# Altium PCB TLV320AIC23B.PcbDoc
Units mil, origin at the board's own origin, x right, y up, seen from the top; angles counter-clockwise.
Board outline 1965 x 1829.38 mil, 2 copper layers (Top Layer, Bottom Layer), stack 62.8 mil thick; 63 components, 45 nets, 198 pads, 103 vias.
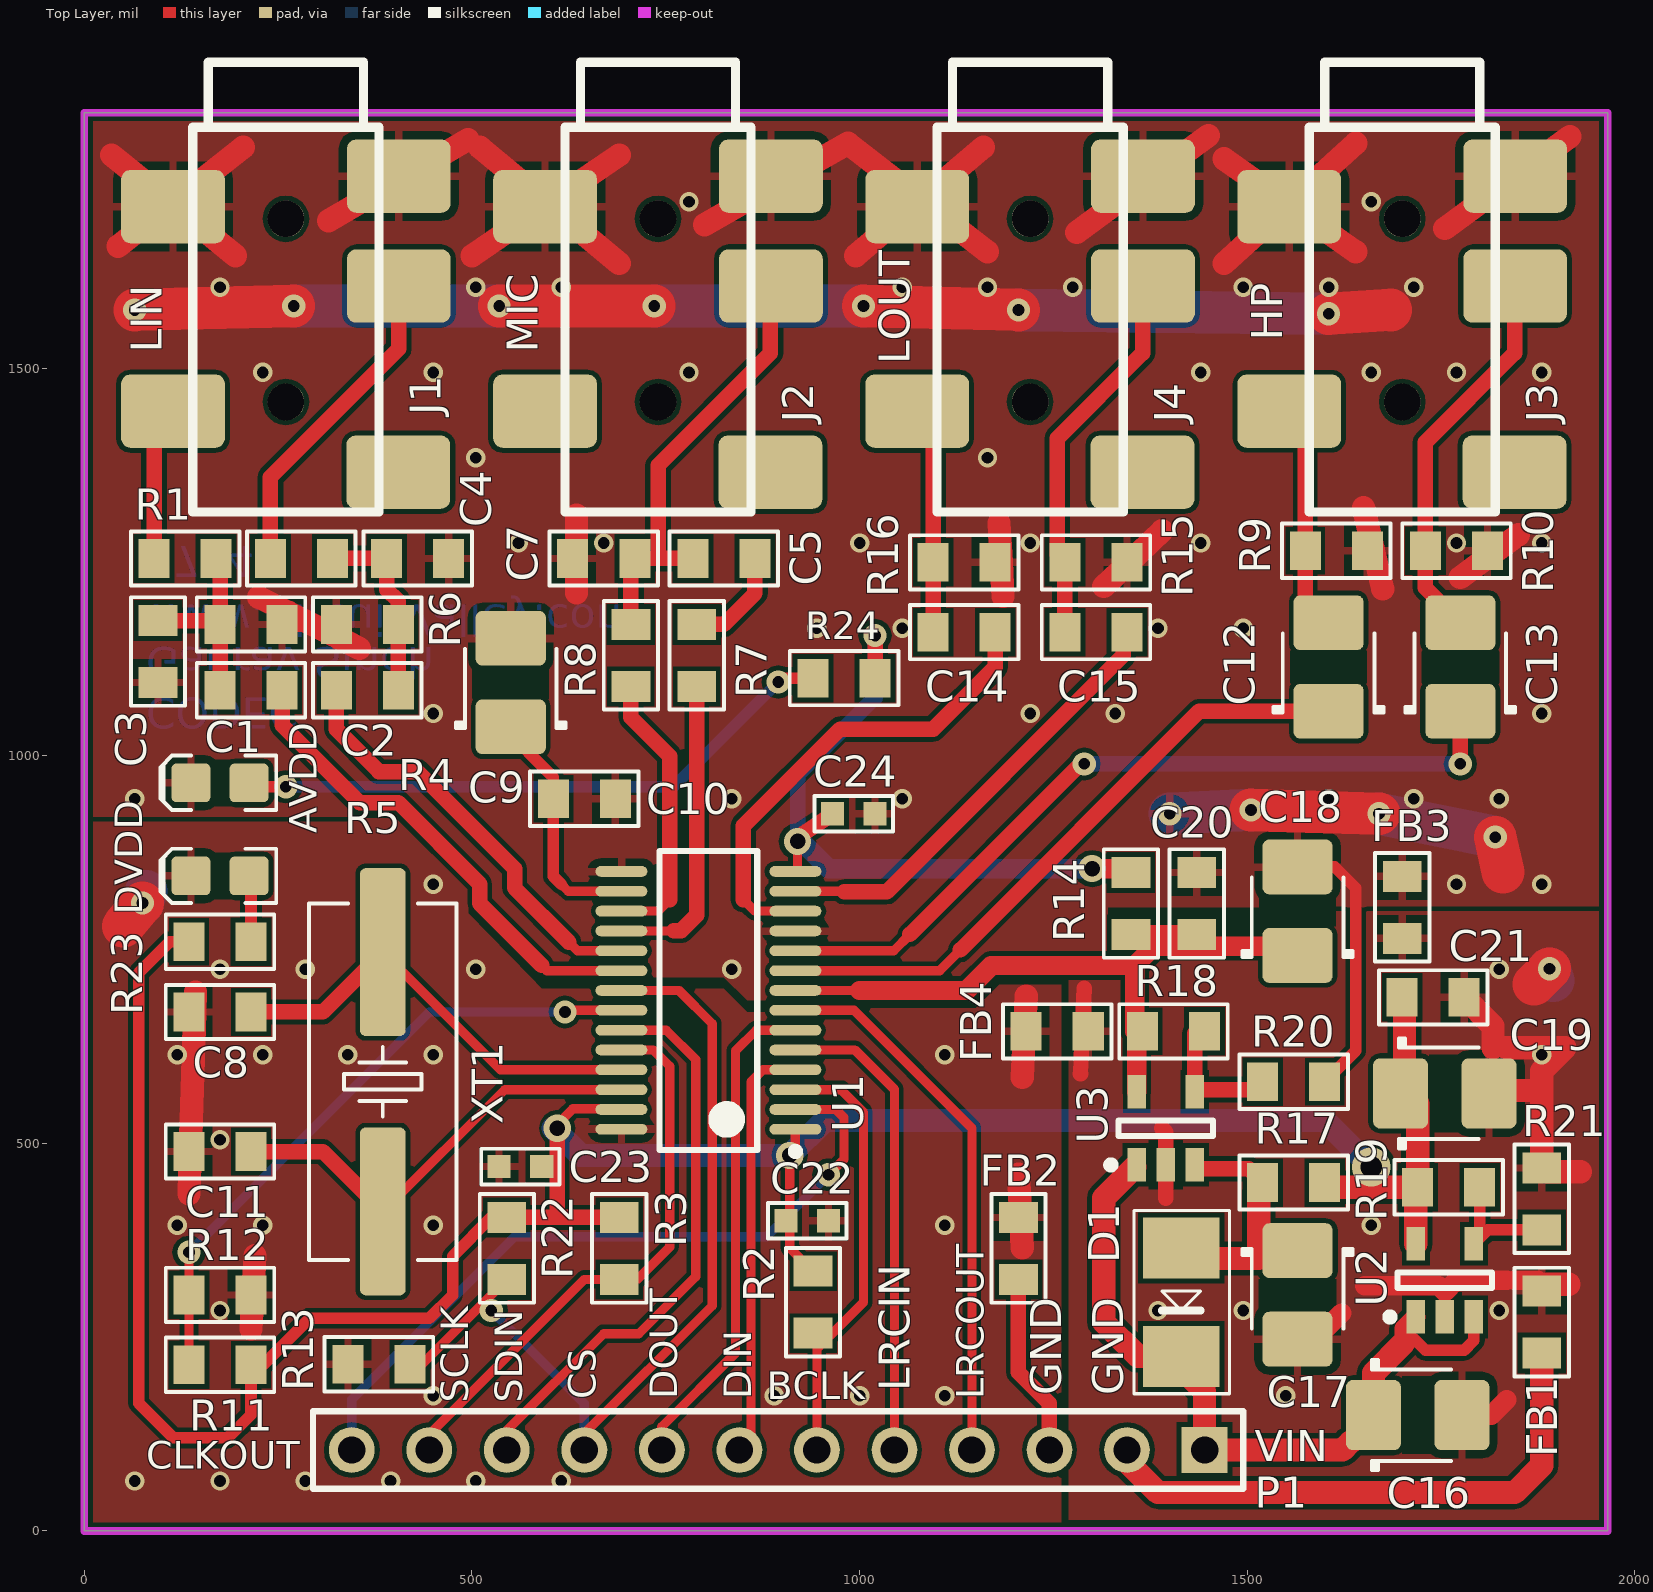
[diagram p0: Top Layer view]
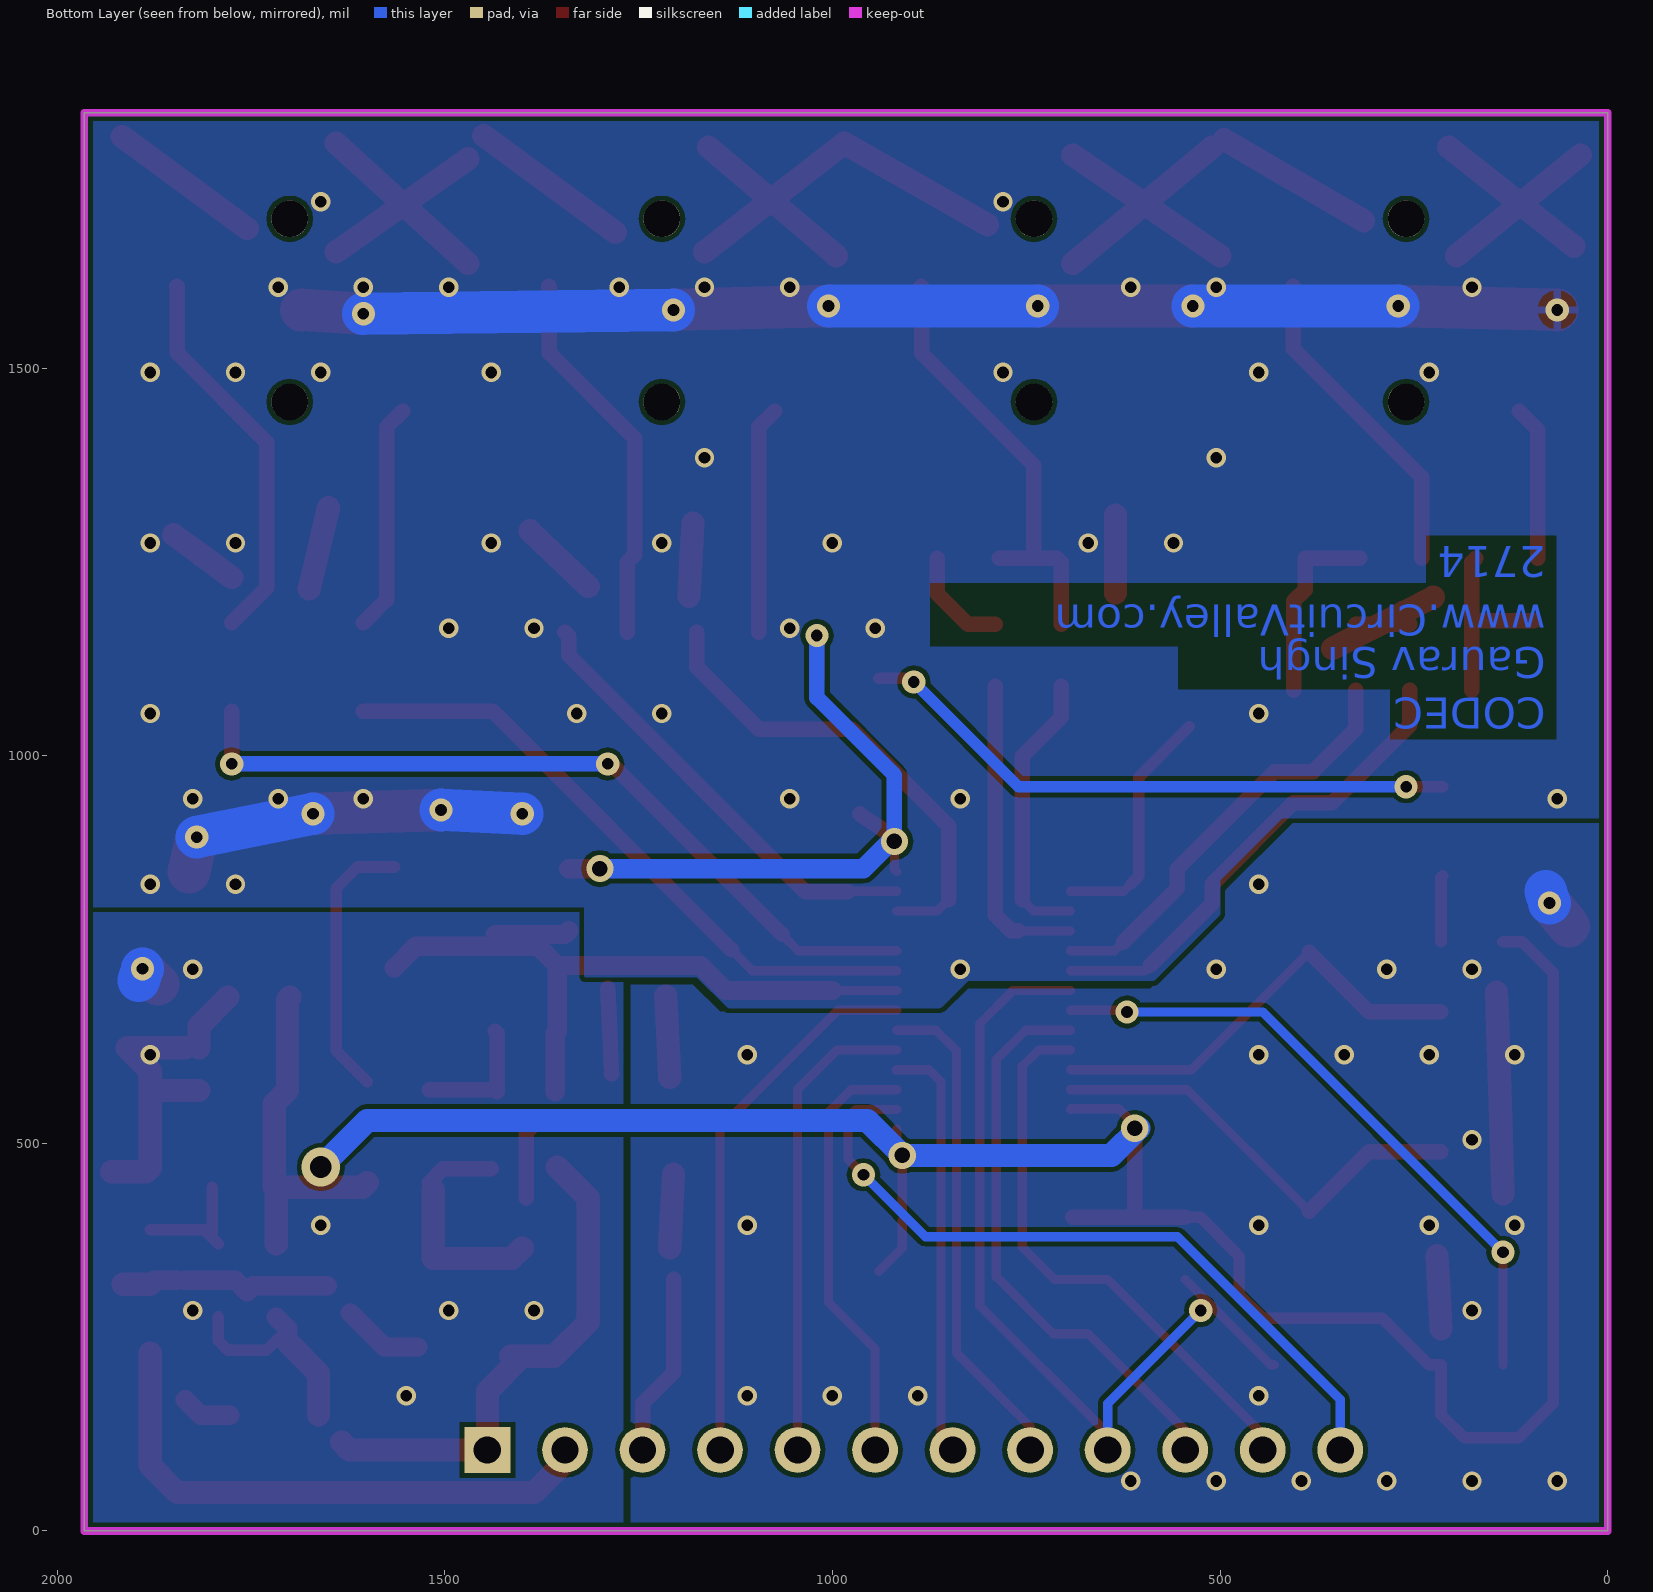
[diagram p1: Bottom Layer view, seen from below]

## Layer stack, top to bottom
Top Layer: signal copper 1.4
Dielectric: core 60, FR-4, Dk 4.8
Bottom Layer: signal copper 1.4

## Board outline
0,0 1965,0 1965,1829.38 0,1829.38 0,0

## Design rules (kind name [scope] priority, off if disabled: settings)
Clearance [All] p1: gap=6
PolygonConnect [All] p1: connectstyle=Relief reliefconductorwidth=10 reliefentries=4 polygonreliefangle="90 Angle" airgapwidth=10
RoutingVias [All] p1: holewidth=15 width=30 viastyle="Through Hole" minholewidth=12 minwidth=30 maxholewidth=250 maxwidth=250
SolderMaskExpansion [All] p1: expansion=4
Width [All] p1: maxlimit=250 minlimit=6 preferedwidth=20
28 further rules are at their usual default settings.

## Components (designator, comment, footprint, x,y, rotation, side; value= is the part's Value field where it differs from the comment)
AVDD "Green" LED-0805-K 175,965 r180 top (schematic designator LED2)
C1 "C0805-GENERIC" 0805C-GENERIC 245,1084.38 r180 top
C2 "C0805-GENERIC" 0805C-GENERIC 335,1084.38 r0 top
C3 "C0805-GENERIC" 0805C-GENERIC 95,1104.38 r90 top
C4 "C0805-GENERIC" 0805C-GENERIC 460,1254.38 r180 top
C5 "C0805-GENERIC" 0805C-GENERIC 795,1254.38 r0 top
C7 "C0805-GENERIC" 0805C-GENERIC 640,1254.38 r0 top
C8 "C0805-GENERIC" 0805C-GENERIC 145,669.38 r0 top
C9 "47µ" CAPMP3528X210N 550,1094.38 r90 top
C10 "C0805-GENERIC" 0805C-GENERIC 615,944.38 r0 top
C11 "C0805-GENERIC" 0805C-GENERIC 205,489.38 r180 top
C12 "47µ" CAPMP3528X210N 1605,1114.38 r90 top
C13 "47µ" CAPMP3528X210N 1775,1114.38 r90 top
C14 "C0805-GENERIC" 0805C-GENERIC 1105,1159.38 r0 top
C15 "C0805-GENERIC" 0805C-GENERIC 1275,1159.38 r0 top
C16 "47µ" CAPMP3528X210N 1720,149.38 r0 top
C17 "47µ" CAPMP3528X210N 1565,304.38 r270 top
C18 "47µ" CAPMP3528X210N 1565,799.38 r90 top
C19 "47µ" CAPMP3528X210N 1755,564.38 r0 top
C20 "C0805-GENERIC" 0805C-GENERIC 1435,779.38 r90 top
C21 "C0805-GENERIC" 0805C-GENERIC 1710,688.24 r0 top
C22 "100nF" 0603C-GENERIC 905,400 r0 top
C23 "100nF" 0603C-GENERIC 590,470 r180 top
C24 "100nF" 0603C-GENERIC 965,925 r0 top
D1 "MBRS140" DIODE-SMA 1415,399.38 r90 top
DVDD "Green" LED-0805-K 175,845 r180 top (schematic designator LED1)
FB1 "0805FB-GENERIC" 0805FB-GENERIC 1880,239.38 r90 top
FB2 "0805FB-GENERIC" 0805FB-GENERIC 1205,334.38 r90 top
FB3 "0805FB-GENERIC" 0805FB-GENERIC 1700,774.38 r90 top
FB4 "0805FB-GENERIC" 0805FB-GENERIC 1285,644.38 r180 top
J1 "Audio SMD 3.5mm" SMDAudio3.5mm 260,1574.38 r270 top
J2 "Audio SMD 3.5mm" SMDAudio3.5mm 740,1574.38 r270 top
J3 "Audio SMD 3.5mm" SMDAudio3.5mm 1700,1574.38 r270 top
J4 "Audio SMD 3.5mm" SMDAudio3.5mm 1220,1574.38 r270 top
P1 "Header 12" HDR1X12 1445,104.38 r180 top
R1 "R0805" 0805R-GENERIC 160,1254.38 r180 top
R2 "R0805" 0805R-GENERIC 940,265 r90 top
R3 "R0805" 0805R-GENERIC 690,334.38 r90 top
R4 "R0805" 0805R-GENERIC 310,1254.38 r180 top
R5 "R0805" 0805R-GENERIC 245,1169.38 r180 top
R6 "R0805" 0805R-GENERIC 335,1169.38 r0 top
R7 "R0805" 0805R-GENERIC 790,1099.38 r90 top
R8 "R0805" 0805R-GENERIC 705,1099.38 r90 top
R9 "R0805" 0805R-GENERIC 1645,1264.38 r180 top
R10 "R0805" 0805R-GENERIC 1800,1264.38 r180 top
R11 "R0805" 0805R-GENERIC 145,214.38 r0 top
R12 "R0805" 0805R-GENERIC 205,304.38 r180 top
R13 "R0805" 0805R-GENERIC 350,215 r0 top
R14 "R0805" 0805R-GENERIC 1350,779.38 r90 top
R15 "R0805" 0805R-GENERIC 1335,1249.38 r180 top
R16 "R0805" 0805R-GENERIC 1165,1249.38 r180 top
R17 "R0805" 0805R-GENERIC 1590,449.38 r180 top
R18 "R0805" 0805R-GENERIC 1375,644.38 r0 top
R19 "R0805" 0805R-GENERIC 1730,443.24 r0 top
R20 "R0805" 0805R-GENERIC 1590,579.38 r180 top
R21 "R0805" 0805R-GENERIC 1880,458.24 r270 top
R22 "R0805" 0805R-GENERIC 545,334.38 r90 top
R23 "R0805" 0805R-GENERIC 205,760 r180 top
R24 "R0805" 0805R-GENERIC 950,1100 r0 top
U1 "TLV320AIC23BPWG4" PW28_N 805,684.38 r180 top
U2 "TPS76301DBVR" TI-DBV5_N 1755,323.24 r90 top
U3 "TPS76301DBVR" TI-DBV5_N 1395,519.38 r90 top
XT1 "6.00MHz" CRYSTAL_HC49-US-SM 385,579.38 r90 top

## Footprints (in the part's own frame and the unit in brackets; to place one, negate y for a bottom-side part, rotate by r counter-clockwise, add the part's x,y. Pads: shape width x height; smd on the part's side, far side on the other; paste and mask are expansions set on the pad)
0603C-GENERIC [mil] "CAPACITOR 0603"
  rect 30x30 smd: 1(0,0) 2(55,0)
  silkscreen extent -23,-23 78,23, body extent -4,-15 59,15, height 19
0805C-GENERIC [mil] "CAPACITOR 0805"
  rect 40x50 smd: 1(-10,0) 2(70,0)
  silkscreen extent -40,-35 100,35, body extent -11,-25 70,25, height 26
0805FB-GENERIC [mil] "FERRITE BEAD 0805"
  rect 40x50 smd: 1(-10,0) 2(70,0)
  silkscreen extent -40,-35 100,35, body extent -11,-25 70,25, height 26
0805R-GENERIC [mil] "RESISTOR 0805"
  rect 40x50 smd: 1(-10,0) 2(70,0)
  silkscreen extent -40,-35 100,35, body extent -11,-25 70,25, height 27
CAPMP3528X210N [mm] "Molded body capacitor, Body 3.5x2.8mm, 1210, IPC Nominal settings"
  round 0.254 on Mech14: 0(0,0)
  rrect25% 1.8x2.3 smd: 1(-1.45,0) 2(1.45,0)
  Top Layer pour cut-out: -0.508,1.27 0.508,1.27 0.508,-1.27 -0.508,-1.27
  silkscreen extent -1.5,-1.8 1.1,1.8, body extent -1.75,-1.4 1.75,1.4, height 2.1
CRYSTAL_HC49-US-SM [mm] "SMD Crystal HC49/US-SM package"
  round 0.508 on Mech14: 0(0,0)
  rrect25% 5.5x1.5 smd: 1(-4.25,0) 2(4.25,0)
  silkscreen extent -5.84,-2.41 5.84,2.41, body extent -6.4,-2.41 6.4,2.42, height 4.29
DIODE-SMA [mm]
  rect 2x2.5 smd: A(-0.875,0) K(-4.425,0)
  silkscreen extent -5.65,-1.58 0.35,1.55, body extent -5.2,-1.3 0,1.3, height 2.4
HDR1X12 [mm] "Connector; Header; 12 Position"
  rect 1.5x1.5 hole 0.9: 1(0,0)
  round 1.5 hole 0.9: 2(2.54,0) 3(5.08,0) 4(7.62,0) 5(10.16,0) 6(12.7,0) 7(15.24,0) 8(17.78,0) 9(20.32,0) 10(22.86,0) 11(25.4,0) 12(27.94,0)
  silkscreen extent -1.27,-1.27 29.21,1.27
LED-0805-K [mil]
  round 20 on Mech14: 0(0,0)
  rrect25% 50x50 smd: A(-37.5,0) K(37.5,0)
  Top Layer pour cut-out: -15,30 15,30 15,-30 -15,-30
  silkscreen extent -72,-35 77,35, body extent -39,-25 39,25, height 31
PW28_N [mm] "TSOP, 28-Leads, Body 9.7x4.4mm, Pitch 0.65mm, IPC Medium Density"
  oval 1.7x0.35 smd: 1(-2.85,4.225) 2(-2.85,3.575) 3(-2.85,2.925) 4(-2.85,2.275) 5(-2.85,1.625) 6(-2.85,0.975) 7(-2.85,0.325) 8(-2.85,-0.325) 9(-2.85,-0.975) 10(-2.85,-1.625) 11(-2.85,-2.275) 12(-2.85,-2.925) 13(-2.85,-3.575) 14(-2.85,-4.225) 15(2.85,-4.225) 16(2.85,-3.575) 17(2.85,-2.925) 18(2.85,-2.275) 19(2.85,-1.625) 20(2.85,-0.975) 21(2.85,-0.325) 22(2.85,0.325) 23(2.85,0.975) 24(2.85,1.625) 25(2.85,2.275) 26(2.85,2.925) 27(2.85,3.575) 28(2.85,4.225)
  silkscreen extent -2.98,-4.9 1.6,5.07, body extent -2.25,-4.9 2.25,4.9, height 1.2
SMDAudio3.5mm [mm]
  rrect25% 2.4x3.4 smd: 1(-3.4,-3.7) 2(3.3,-3.7) 3(-0.8,3.7) 4(5.3,3.683) 5(-4.4,3.7)
  round 1.2 hole 1.2 unplated: 6(-3,0) 7(3,0)
  silkscreen extent -8.13,-3.05 6.6,3.05, body extent -7.97,-3.05 6.6,3.05, height 5
TI-DBV5_N [mm] "SOT23, 5-Leads, Body 2.9x1.6mm, Pitch 0.95mm, IPC Medium Density"
  rect 1.1x0.6 smd: 1(-1.2,0.95) 2(-1.2,0) 3(-1.2,-0.95) 4(1.2,-0.95) 5(1.2,0.95)
  silkscreen extent -1.32,-1.55 0.25,1.92, body extent -0.87,-1.52 0.87,1.53, height 1.45

## Part data
AVDD DVDD: library part LED_SMD_Green_0805, "LED, 0805 SMD, Green"
C1 C2 C3 C4 C5 C7 C8 C10 C11 C14 C15 C20 C21: "GENERIC CAPACITOR NON POLARISED0603"
C9 C12 C13 C16 C17 C18 C19: library part CAPT_47u_1210_6V3, "Capacitor SMD Tantalum 47uF 20% 6.3V 1210"
C22 C23 C24: library part 0603C-100NF-25V-X7R-TDK, "CAPACITOR 0603 CERAMIC"
D1: "DIODE"
FB1 FB2 FB3 FB4: "FERRITE BEAD SMD"
P1: "Header, 12-Pin"
R1 R2 R3 R4 R5 R6 R7 R8 R9 R10 R11 R12 R13 R14 R15 R16 R17 R18 R19 R20 R21 R22 R23 R24: library part R0805-GENERIC, "GENERIC RESISTOR 0805"
U1: "Low-Power Stereo CODEC with HP Amplifier, 1 ADC and 1 DAC, 100 dB DAC SNR, 0 to 70 degC, 28-pin TSSOP (PW), Green (RoHS & no Sb/Br)"
U2 U3: "Single Output LDO, 150 mA, Adjustable 1.5 to 6.5 V Output, 2.7 to 10 V Input, with Low IQ, 5-pin SOT-23 (DBV), -40 to 125 degC, Green (RoHS & no Sb/Br)"
XT1: library part Crystal_6MHz_HC49/US, "Resonator Ceramic 6.00 MHz 30ppm"

## Via types
v1: diameter 25, hole 15, Top Layer to Bottom Layer, tented both sides, 76 vias
v2: diameter 30, hole 15, Top Layer to Bottom Layer, tented both sides, 22 vias
v3: diameter 35, hole 20, Top Layer to Bottom Layer, tented both sides, 4 vias
v4: diameter 50, hole 28, Top Layer to Bottom Layer, tented both sides, 1 vias

## Nets (pads, with @x,y where several pads share a name; then routed paths per layer and width w, separated by ;. In a path a pad name is that pad's centre, name@x,y a point inside that pad or via, vN(x,y) a via of type N, cw(c..) or ccw(c..) an arc to the next point about the centre after c; other vN are vias at no path point)
AGND: AVDD.K C3.1 C4.1 C7.1 C9.2 C10.2 C18.2 C20.2 C24.2 FB3.2 J1.1 J1.5 J2.1 J2.5 J3.1 J3.5 J4.1 J4.5 R5.1 R6.1 R9.1 R10.1 R15.1 R16.1 R20.1 U1.11 U1.15 | length 5749.4
  Top Layer w15: C18.2 1612.91,856.46 1640,829.38 1640,619.38 R20.1
  Top Layer w20: R5.1 293.94,1169.38 R6.1
  Top Layer w30: 35,1775 J1.1@112.68,1711.88 ; 43.49,1657.08 111.92,1711.28 J1.1@112.68,1711.88 ; 195,1645 115.46,1709.62 J1.1@112.68,1711.88 ; 205,1785 J1.1@112.68,1711.88 ; 225,1204.38 262.98,1185.09 293.94,1169.38 318.63,1156.84 355,1138.38 ; 315,1690 398.32,1738.6 407.72,1744.09 495,1795 ; 500,1645 593.72,1709.12 J2.1@597.75,1711.88 ; 510,1785 597.52,1712.06 J2.1@597.75,1711.88 ; 635,1210 635,1310 ; 690,1635 J2.1@597.75,1711.88 ; 690,1775 J2.1@597.75,1711.88 ; 800,1685 891.67,1737.03 985,1790 J4.1@1079.38,1716.59 ; 995,1645 1072.32,1710.6 J4.1@1079.38,1716.59 ; 1160,1785 J4.1@1079.38,1716.59 ; 1165,1650 1080.29,1715.89 J4.1@1079.38,1716.59 ; 1180,1300 1182.65,1249.78 1185,1205.38 ; 1280,1675 1370.26,1741.36 1450,1800 ; 1315,1218.38 1346.17,1248.15 1390,1290 ; 1470,1635 1552.51,1710.23 J3.1@1553.45,1711.09 ; 1470,1770 J3.1@1553.45,1711.09 ; 1640,1650 1557.22,1708.43 1555.39,1709.73 J3.1@1553.45,1711.09 ; 1640,1790 J3.1@1553.45,1711.09 ; 1650,1320 1662.8,1266.23 1675,1215 ; 1755,1680 1846.11,1747 1916.51,1798.76 ; 1775,1230 1814.15,1258.71 1850,1285
  Top Layer w55: v2(65,1575) v2(270,1580) ; v2(535,1580) v2(735,1580) ; v2(1005,1580) v2(1205,1575) ; v2(1505,930) v2(1670,925) ; v2(1605,1570) 1685,1575 ; v2(1820,895) 1830,850
  Bottom Layer w55: v2(270,1580) v2(535,1580) ; v2(735,1580) v2(1005,1580) ; v2(1205,1575) v2(1605,1570) ; v2(1400,925) v2(1505,930) ; v2(1670,925) v2(1820,895)
  other v1: 835,724.38 1770,834.38 1880,834.38 65,944.38 835,944.38 1055,944.38 1605,944.38 1715,944.38 1825,944.38 450,1054.38 1220,1054.38 1330,1054.38 1880,1054.38 945,1164.38 1055,1164.38 1385,1164.38 1495,1164.38 560,1274.38 670,1274.38 1000,1274.38 1220,1274.38 1440,1274.38 1770,1274.38 1880,1274.38 505,1384.38 1165,1384.38 230,1494.38 450,1494.38 780,1494.38 1440,1494.38 1660,1494.38 1770,1494.38 1880,1494.38 175,1604.38 505,1604.38 615,1604.38 1055,1604.38 1165,1604.38 1275,1604.38 1495,1604.38 1605,1604.38 1715,1604.38 780,1714.38 1660,1714.38
AVDD: C24.1 R14.2 R24.2 U1.14 | length 894.3
  Top Layer w12: U1.14 920,853.51 v3(920,889.38) v3@920,894.38
  Top Layer w20: v3@920,894.38 C24.1 ; R24.2 v2(1020,1155)
  Top Layer w25: v3(1300,854.38) R14.2@1340,854.38
  Bottom Layer w20: v3(920,889.38) 920,975 1020,1075 v2(1020,1155)
  Bottom Layer w25: v3@922.5,891.88 960,854.38 v3(1300,854.38)
BCLK: P1.6 R2.1 U1.3 | length 560.5
  Top Layer w12: U1.3 975.97,569.22 1005,540.18 1005,295 945,235 P1.6
CLKOUT: P1.12 U1.2 | length 949.3
  Top Layer w12: U1.2 969.47,543.63 980,533.1 980,479.38 v2(960,459.38)
  Bottom Layer w12: P1.12 345,169.38 555,379.38 880,379.38 v2(960,459.38)
DGND: C8.1 C11.2 C22.2 C23.2 DVDD.K FB2.2 FB4.2 R12.1 R13.1 U1.28 | length 609.8
  Top Layer w30: 135,435 136.75,489.32 142.55,669.13 143.39,695.21 ; 215,260.38 217.32,304.25 220,355 ; 1205,460 1207.93,404.53 1210,365.38 ; 1210,585 1212.83,644.48 1215,690
  Top Layer w55: 50,780 v2(75,810)
  Bottom Layer w55: v2(75,810) 80,825
  other v1: 65,64.38 175,64.38 285,64.38 395,64.38 505,64.38 615,64.38 450,174.38 890,174.38 1000,174.38 1110,174.38 175,284.38 120,394.38 230,394.38 450,394.38 1110,394.38 175,504.38 120,614.38 230,614.38 340,614.38 450,614.38 1110,614.38 175,724.38 285,724.38 505,724.38 450,834.38
DIN: P1.7 U1.4 | length 545.4
  Top Layer w12: P1.7 860,119.38 860,579.38 875.43,594.81 U1.4 U1.4@917.64,594.38
DOUT: P1.8 U1.6 | length 642.6
  Top Layer w12: P1.8 745,134.38 840,229.38 840,619.38 866.61,645.99 U1.6
DVDD: C19.1 C21.1 C22.1 C23.1 R2.2 R3.2 R11.2 R17.1 R19.1 R22.2 R23.2 U1.1 U1.27 U2.5 | length 3454.1
  Top Layer w12: v3(610,519.38) 610,524.38 630,544.38 692.05,544.38 U1.27 ; C22.1@910,400 910,365 R2.2 ; C22.1@910,410 v3(910,484.38) 917.2,491.58 U1.1
  Top Layer w15: R23.2 110,760 70,720 70,164.47 114.47,120 185,120 215,150 R11.2 230.53,214.38 290.53,274.38 445,274.38 475,304.38 475,354.38 525,404.38 R22.2
  Top Layer w20: R22.2 605,404.38 ; v3(610,519.38) 610,409.38 605,404.38 ; R3.2 605,404.38
  Top Layer w30: R17.1 1606.14,443.24 1660,443.24 ; v4(1660,469.38) 1663.07,466.31 1663.07,443.24 R19.1 ; C21.1 1702.91,685.32 1702.91,568.24 1720,551.15 R19.1 ; U2.5 1717.6,440.84 R19.1
  Bottom Layer w30: v3(610,519.38) 605,519.38 640,484.38 v3(910,484.38) 955,529.38 1600,529.38 v4(1660,469.38)
GND: FB1.1 P1.2 | length 726.1
  Top Layer w30: P1.2 1345,89.38 1385,49.38 1845,49.38 1880,84.38 FB1.1
HEADPHONE_L: C12.1 U1.9 | length 826.4
  Top Layer w12: U1.9 1103.39,722.76 1130,749.38
  Top Layer w20: 1130,749.38 1437.91,1057.29 C12.1
HEADPHONE_R: C13.1 U1.10 | length 1025.5
  Top Layer w12: U1.10 1043.98,748.35 1065,769.38
  Top Layer w20: 1065,769.38 1285,989.38 v2(1290,989.38) ; v2(1775,989.38) C13.1
  Bottom Layer w20: v2(1290,989.38) v2(1775,989.38)
HPVDD: C18.1 C20.1 R14.1 R18.1 U1.8 U3.5 | length 944
  Top Layer w12: U1.8 1000,697.17
  Top Layer w25: 1000,697.17 1137.8,697.17 1170,729.38 1355,729.38 ; R14.1@1340,774.38 1345,769.38 C20.1 ; U3.5 1357.6,641.78 1355,644.38 1355,729.38 ; C18.1@1565,726.46 1537.09,754.38 1380,754.38 1355,729.38
LINE_IN_L: C1.1 U1.20 | length 628.6
  Top Layer w12: 590,729.38 596.61,722.76 U1.20
  Top Layer w20: C1.1 255,1039.38 355,939.38 405,939.38 510,834.38 510,809.38 590,729.38
LINE_IN_R: C2.1 U1.19 | length 550.9
  Top Layer w12: 625,759.38 636.02,748.35 U1.19
  Top Layer w20: C2.1 325,1034.38 380,979.38 430,979.38 555,854.38 555,829.38 625,759.38
LINE_OUT_L: C14.2 U1.12 | length 623.3
  Top Layer w12: 850,814.38 864.84,799.53 U1.12
  Top Layer w20: 850,814.38 850,909.38 975,1034.38 1095,1034.38 1175,1114.38 C14.2
LINE_OUT_R: C15.2 U1.13 | length 581.5
  Top Layer w12: U1.13 979.25,825.12 980,824.38
  Top Layer w20: 980,824.38 1035,824.38 1340,1129.38 1340,1154.38 C15.2
LRCIN: P1.5 U1.5 | length 613.9
  Top Layer w12: U1.5 993.98,620.4 1045,569.38 P1.5
LRCOUT: P1.4 U1.7 | length 705.8
  Top Layer w12: U1.7 992.8,671.58 1145,519.38 P1.4
MIC_BIAS: R8.1 U1.17 | length 364.1
  Top Layer w12: U1.17 740.16,799.53 755,814.38
  Top Layer w20: R8.1 705,1049.38 755,999.38 755,814.38
MIC_IN: R7.1 U1.18 | length 400.7
  Top Layer w12: U1.18 759.57,773.94 760,774.38
  Top Layer w20: 760,774.38 770,774.38 790,794.38 R7.1
MODE: R11.1 R12.2 U1.22 | length 839.2
  Top Layer w12: R11.1 R12.2 v2(135,359.38) ; v2(620,669.38) 622.2,671.58 U1.22
  Bottom Layer w12: v2(135,359.38) 445,669.38 v2(620,669.38) v2@615,664.38
NetC1_2: C1.2 C3.2 R1.1 R5.2 | length 254.1
  Top Layer w20: C3.2 170,1174.38 R5.2 ; R1.1 175,1249.38 R5.2 ; C1.2 R5.2
NetC2_2: C2.2 C4.2 R4.1 R6.2 | length 246.2
  Top Layer w20: R4.1 C4.2 390,1214.38 405,1199.38 R6.2 C2.2
NetC5_1: C5.1 C7.2 J2.3 R8.2 | length 573.9
  Top Layer w20: R8.2 705,1249.38 C7.2 740,1254.38 ; C5.1 740,1254.38 ; J2.3 885,1605.2 885,1519.38 740,1374.38 740,1254.38
NetC5_2: C5.2 R7.2 | length 136.6
  Top Layer w20: R7.2 825,1169.38 865,1209.38 C5.2
NetC8_2: C8.2 U1.25 XT1.2 | length 572.7
  Top Layer w12: XT1.2 536.89,594.81 U1.25
  Top Layer w20: C8.2 307.68,669.38 XT1.2
NetC9_1: C9.1 C10.1 U1.16 | length 315.6
  Top Layer w12: 615,834.38 624.25,825.12 U1.16
  Top Layer w15: C9.1@540,1037.29 605,972.29 C10.1 605,844.38 615,834.38
NetC11_1: C11.1 U1.26 XT1.1 | length 574.9
  Top Layer w12: XT1.1 542.17,569.22 U1.26
  Top Layer w20: C11.1 307.68,489.38 XT1.1
NetC12_2: C12.2 J3.2 R9.2 | length 294
  Top Layer w20: J3.2 1575,1423.78 R9.2 1575,1201.46 C12.2
NetC13_2: C13.2 J3.3 R10.2 | length 501
  Top Layer w20: C13.2 1730,1216.46 R10.2 1730,1404.38 1845,1519.38 1845,1605.2 J3.3
NetC14_1: C14.1 J4.2 R16.2 | length 293.6
  Top Layer w20: J4.2 1095,1423.78 R16.2 C14.1
NetC15_1: C15.1 J4.3 R15.2 | length 496.5
  Top Layer w20: C15.1 R15.2 1255,1259.38 1255,1409.38 1365,1519.38 1365,1605.2 J4.3
NetC17_1: C17.1 D1.A R17.2 U3.3 | length 295.8
  Top Layer w20: U3.3@1440,467.13 1502.24,467.13 R17.2
  Top Layer w30: D1.A@1400,364.93 1413.46,351.46 1515,351.46 R17.2@1515,439.38
NetFB2_1: FB2.1 P1.3 | length 236.6
  Top Layer w20: FB2.1 1205,204.38 1245,164.38 P1.3
NetJ1_2: J1.2 R1.2 | length 200.2
  Top Layer w20: R1.2 90,1420.12 J1.2
NetJ1_3: J1.3 R4.2 | length 420.1
  Top Layer w20: R4.2 240,1359.38 405.67,1525.04 J1.3
NetLED1_A: DVDD.A R23.1 | length 86
  Top Layer w15: DVDD.A 215,842.5 R23.1
NetLED2_A: AVDD.A R24.1 | length 785.5
  Top Layer w15: AVDD.A@212.5,960 v2(260,960) ; v2(895,1095) 900,1100 R24.1
  Bottom Layer w15: v2(260,960) 760,960 v2(895,1095)
NetR18_2: R18.2 R20.2 U3.4 | length 167.6
  Top Layer w20: R18.2@1435,644.38 1432.4,641.78 U3.4 1435.16,569.38 R20.2@1520,569.38
NetR19_2: R19.2 R21.2 U2.4 | length 160.1
  Top Layer w15: U2.4 U2.4@1800,378.08 ; R19.2 U2.4@1800,378.08 ; R21.2 1810.16,388.24 U2.4@1800,378.08
REG_GND: C16.2 C17.2 C19.2 C21.2 FB1.2 FB3.1 FB4.1 R21.1 U2.2 U3.2 | length 1120
  Top Layer w20: 1285,590 1287.49,644.72 1290,700 ; 1390,519.38 1395,514.38 U3.2 1395,429.38
  Top Layer w25: C17.2@1535,237.29 1577.91,237.29 1621.77,281.15 ; 1651.77,316.15 1747.09,316.15 1755,308.24 1770,323.24 1835,323.24 ; C16.2 1815,149.38 1835,169.38 ; 1845,323.24 1875,323.24 FB1.2@1880,318.24
  Top Layer w30: C21.2 1817.09,651.15 1817.09,623.24 ; C19.2@1817.09,568.24 1880,568.24 ; 1835,623.24 1910,623.24 1880,593.24 1880,568.24 ; FB1.2@1880,318.24 1915,318.24 ; 1930,463.24 1885,463.24 R21.1 1880,568.24
  Top Layer w55: 1870,705 v2(1890,725)
  Bottom Layer w55: v2(1890,725) 1895,710
  other v1: 1550,174.38 1385,284.38 1495,284.38 1825,284.38 1660,394.38 1880,614.38 1825,724.38
SCLK: P1.11 R3.1 U1.24 | length 734.3
  Top Layer w12: P1.11 445,124.38 645,324.38 R3.1 713.24,324.38 755,366.14 755,599.38 733.98,620.4 U1.24
SDIN: P1.10 U1.23 | length 742.5
  Top Layer w12: P1.10 545,129.38 670,254.38 715,254.38 788.65,328.03 788.65,608.03 750.69,645.99 U1.23
SPI_CS: P1.9 R13.2 R22.1 U1.21 | length 1159.2
  Top Layer w12: R13.2@430,214.38 435,214.38 v2@517.5,296.88 ; v2(525,284.38) 517.5,291.88 v2@517.5,296.88 ; R22.1 v2@517.5,296.88 ; P1.9 645,125.53 810,290.53 810,654.38 767.2,697.17 U1.21
  Bottom Layer w12: v2(525,284.38) 645,164.38 P1.9
V_IN: C16.1 D1.K P1.1 U2.1 U2.3 U3.1 | length 934.7
  Top Layer w15: 1715,248.24 1730,233.24 1780,233.24 1792.4,245.64 U2.3
  Top Layer w25: 1702.28,242.97 1702.28,260.68 U2.1
  Top Layer w30: U3.1@1355,469.38 1315,429.38 1315,269.38 1359.21,225.16 D1.K@1400,225.16 ; D1.K D1.K@1400,225.16 ; C16.1@1632.91,114.38 1622.91,104.38 P1.1 1445,180.16 D1.K@1400,225.16 ; C16.1 1662.91,203.6 1702.28,242.97
pads on no net: AVDD.0 C9.0 C12.0 C13.0 C16.0 C17.0 C18.0 C19.0 DVDD.0 J1.4 J1.6 J1.7 J2.2 J2.4 J2.6 J2.7 J3.4 J3.6 J3.7 J4.4 J4.6 J4.7 XT1.0

## Polygon pours and split planes (outlines as drawn)
REG_GND on Top Layer "Bottom Layer-No Net" (solid, remove dead copper, pour order 2): 1270,799.38 1270,14.38 1990.4,14.38 2010,14.38 2010,799.38
AGND on Top Layer "Bottom Layer-No Net" (solid, remove dead copper, pour order 10): 0,914.69 0,1829.38 1965,1829.38 1965,799.38 1965,804.38 1325,804.38 1320,804.38 1320,719.38 1320,724.38 1190,724.38 1150,684.38 860,684.38 855,684.38 825,714.38 550,714.38 490,774.38 490,834.38 410,914.38 405,919.38 4.69,919.38 0,914.69
DGND on Top Layer "Bottom Layer-No Net" (solid, remove dead copper, pour order 12): 0,919.38 405,919.38 495,827.39 495,801.83 495,796.72 575,714.96 590,699.62 745,699.62 825,699.62 855,668.96 985,668.96 1000,668.96 1005,674.07 1150,674.07 1180,704.73 1260,704.73 1260,-5.62 1245,9.71 0,9.71
DGND on Bottom Layer "Bottom Layer-No Net" (solid, remove dead copper, pour order 14): 0,914.69 404.69,914.69 490,829.38 495,824.38 495,799.38 495,794.38 590,699.38 825,699.38 855,669.38 1015,669.38 1145,669.38 1180,704.38 1260,704.38 1260,-5.62 0,-5.62
AGND on Bottom Layer "Bottom Layer-No Net" (solid, remove dead copper, pour order 16): 0,1829.38 1965,1829.38 1965,804.38 1320,804.38 1320,749.38 1320,714.38 1175,714.38 1135,674.38 860,674.38 830,704.38 825,709.38 595,709.38 585,709.38 505,789.38 500,794.38 500,839.38 420,919.38 0,919.38
REG_GND on Bottom Layer "Bottom Layer-No Net" (solid, remove dead copper, pour order 18): 1965,799.38 1965,0 1270,0 1270,709.38 1325,709.38 1320,709.38 1320,799.38

## Keep-outs
Keep-Out Layer:
  the board outline again, w10

## Other copper
Bottom Layer:
  text "2714" at 80,1270 h40 r180
  text "www.CircuitValley.com" at 80,1195 h40 r180
  text "Gaurav Singh" at 80,1140 h40 r180
  text "CODEC" at 80,1075 h40 r180

## Silkscreen, mask and mechanical layers (free items; w line width, h text height)
Top Overlay:
  text "HP" at 1545,1535 h40 r90
  text "LIN" at 100,1520 h40 r90
  text "MIC" at 585,1520 h40 r90
  text "LOUT" at 1065,1505 h40 r90
  text "LRCIN" at 1065,180 h40 r90
  text "GND" at 1260,175 h40 r90
  text "GND" at 1340,175 h40 r90
  text "CS" at 660,170 h36 r90
  text "DOUT" at 765,170 h36 r90
  text "DIN" at 860,170 h36 r90
  text "BCLK" at 880,170 h36
  text "LRCOUT" at 1160,170 h36 r90
  text "SCLK" at 495,165 h36 r90
  text "SDIN" at 565,165 h36 r90
  text "VIN" at 1510,90 h40
  text "CLKOUT" at 80,80 h36